# EAGLE board print_symbole_circuit (EAGLE 9.7.0)

Size 175.44 x 93.07 mm. Coordinates in mm from the lower left corner, seen from the top.
Outline: 0,0 175.44,0 175.44,93.08 0,93.08 0,0
Copper layers (1*16): Top 0.035mm / dielectric 1.5mm / Bottom 0.035mm
Design rules "default": minimum track width 6mil, minimum drill 0.35mm, track to track 6mil, track to pad 6mil, pad to pad 6mil, via to via 6mil, smd to smd 6mil, copper to edge 40mil, drill to drill 6mil, minimum pad ring 10mil, minimum via ring 8mil, stop-mask expansion 4mil, vias tented up to drill 0mil, thermal gap 10mil

## Footprints (pad centres in the part's own frame; a part is rotated, then mirrored left to right if it is on the bottom)
MOTOR = drill 1.118 pad 3.15 octagon: + 2.54,0; - -2.54,0
BATTERY-GENERIC = drill 1.118 pad 3.15 octagon: + 2.54,0; - -2.54,0
ARDUINO-UNO-R3-SHIELD = drill 1.016 pad 1.88: 3.3V 24.13,-2.54; 5V 24.13,0; A0 24.13,12.7; A1 24.13,15.24; A2 24.13,17.78; A3 24.13,20.32; A4 24.13,22.86; A5 24.13,25.4; AREF -24.13,-13.97; D2 -24.13,20.32; D3 -24.13,17.78; D4 -24.13,15.24; D5 -24.13,12.7; D6 -24.13,10.16; D7 -24.13,7.62; D8 -24.13,3.81; D9 -24.13,1.27; D10 -24.13,-1.27; D11 -24.13,-3.81; D12 -24.13,-6.35; D13 -24.13,-8.89; GND@0 24.13,2.54; GND@1 24.13,5.08; GND@2 -24.13,-11.43; IOREF 24.13,-7.62; NC 24.13,-10.16; RES 24.13,-5.08; RX -24.13,25.4; SCL -24.13,-19.05; SDA -24.13,-16.51; TX -24.13,22.86; VIN 24.13,7.62
DIP762W53P254L1969H508Q16B = drill 0.743 pad 1.343: 1 -3.81,8.89; 2 -3.81,6.35; 3 -3.81,3.81; 4 -3.81,1.27; 5 -3.81,-1.27; 6 -3.81,-3.81; 7 -3.81,-6.35; 8 -3.81,-8.89; 9 3.81,-8.89; 10 3.81,-6.35; 11 3.81,-3.81; 12 3.81,-1.27; 13 3.81,1.27; 14 3.81,3.81; 15 3.81,6.35; 16 3.81,8.89

## Placement (x,y rotation side)
M1  MOTOR_HDR  [MOTOR]  110.62,84.82 0 top
M2  MOTOR_HDR  [MOTOR]  136.8,83.9 0 top
M3  MOTOR_HDR  [MOTOR]  161.09,83.06 0 top
M4  MOTOR_HDR  [MOTOR]  110.87,8.26 180 top
P1  BATTERYGENERIC  [BATTERY-GENERIC]  62.96,84.21 180 top
U1  ARDUINO-UNO-R3-SHIELD  [ARDUINO-UNO-R3-SHIELD]  47.88,43.5 270 top
U2  L293E  [DIP762W53P254L1969H508Q16B]  109.69,42.06 90 top
U3  L293E  [DIP762W53P254L1969H508Q16B]  135.09,42.06 90 top
U4  L293E  [DIP762W53P254L1969H508Q16B]  160.49,42.06 90 top

## Library data of the parts
M1-M4 P1 U1-U4 = Tinkercad

## Nets
M1_+: M1.+ U2.11
M1_-: M1.- U2.14
M2_+: M2.+ U3.11
M2_-: M2.- U3.14
M3_+: M3.+ U4.11
M3_-: M3.- U4.14
M4_+: M4.+ U2.3
M4_-: M4.- U2.6
P1+: P1.+ U2.1 U2.9 U2.16 U3.1 U3.9 U3.16 U4.1 U4.9 U4.16
P1-: P1.- U1.GND@0 U1.GND@1 U1.GND@2 U2.4 U2.5 U2.12 U2.13 U3.4 U3.5 U3.12 U3.13 U4.4 U4.5 U4.12 U4.13
U1_5V: U1.5V U2.8 U3.8 U4.8
U1_D2: U1.D2 U2.10
U1_D3: U1.D3 U2.15
U1_D4: U1.D4 U3.10
U1_D5: U1.D5 U3.15
U1_D6: U1.D6 U4.10
U1_D7: U1.D7 U4.15

## Tracks (layer width: path | path; a pad name or v marks a point on that pad's centre or on a via)
M1_+  (1 unrouted)
M1_-  (1 unrouted)
M2_+  (1 unrouted)
M2_-  (1 unrouted)
M3_+  (1 unrouted)
M3_-  (1 unrouted)
M4_+  (1 unrouted)
M4_-  (1 unrouted)
P1+  (9 unrouted)
P1-  (15 unrouted)
U1_5V  (3 unrouted)
U1_D2  (1 unrouted)
U1_D3  (1 unrouted)
U1_D4  (1 unrouted)
U1_D5  (1 unrouted)
U1_D6  (1 unrouted)
U1_D7  (1 unrouted)